# EAGLE board MAIN_BASE (EAGLE 7.6.0)

Size 201.93 x 92.71 mm. Coordinates in mm from the lower left corner, seen from the top.
Outline: 201.93,90.17 201.93,2.54 arc-90 199.39,0 2.54,0 arc-90 0,2.54 0,90.17 arc-90 2.54,92.71 199.39,92.71 arc-90 201.93,90.17
Copper layers (1*16): Top 0.035mm / dielectric 1.5mm / Bottom 0.035mm
Design rules "SparkFun-2-layer-STANDARD *": minimum track width 8mil, minimum drill 20mil, track to track 10mil, track to pad 8mil, pad to pad 8mil, via to via 10mil, smd to smd 8mil, copper to edge 8mil, drill to drill 8mil, minimum pad ring 10mil, minimum via ring 10mil, stop-mask expansion 4mil, vias tented up to drill 25mil, thermal gap 10mil
Net classes: 1 8_mil: width 0.203 mm; 2 10_mil: width 0.254 mm; 3 12_mil: width 0.305 mm; 4 15_mil: width 0.381 mm; 5 20_mil: width 0.508 mm; 6 25_mil: width 0.635 mm; 7 30_mil: width 0.762 mm
Holes 3.05 mm at 5.08,87.63 196.85,87.63 196.85,5.08 5.08,5.08

## Footprints (pad centres in the part's own frame; a part is rotated, then mirrored left to right if it is on the bottom)
MUSIC_INSTRUMENT_SHIELD = hole 3.048: 20.32,29.21; -22.86,-21.59
SIMON_JUMPS_MAIN_BOARD = hole 3.048: -27.94,46.99; 27.94,46.99; 27.94,-44.45; -27.94,-44.45
NOISY_CRICKET = hole 3.048: 12.7,8.89; 12.7,-8.89

## Placement (x,y rotation side)
E$1  [MUSIC_INSTRUMENT_SHIELD]  64.77,48.26 180 top
E$2  [SIMON_JUMPS_MAIN_BOARD]  142.24,45.72 270 top
E$3  [NOISY_CRICKET]  20.32,46.99 270 top

## Library data of the parts
E$1-E$3 = simon_jumps